# EAGLE board LWOC 2.0 (EAGLE 9.6.2)
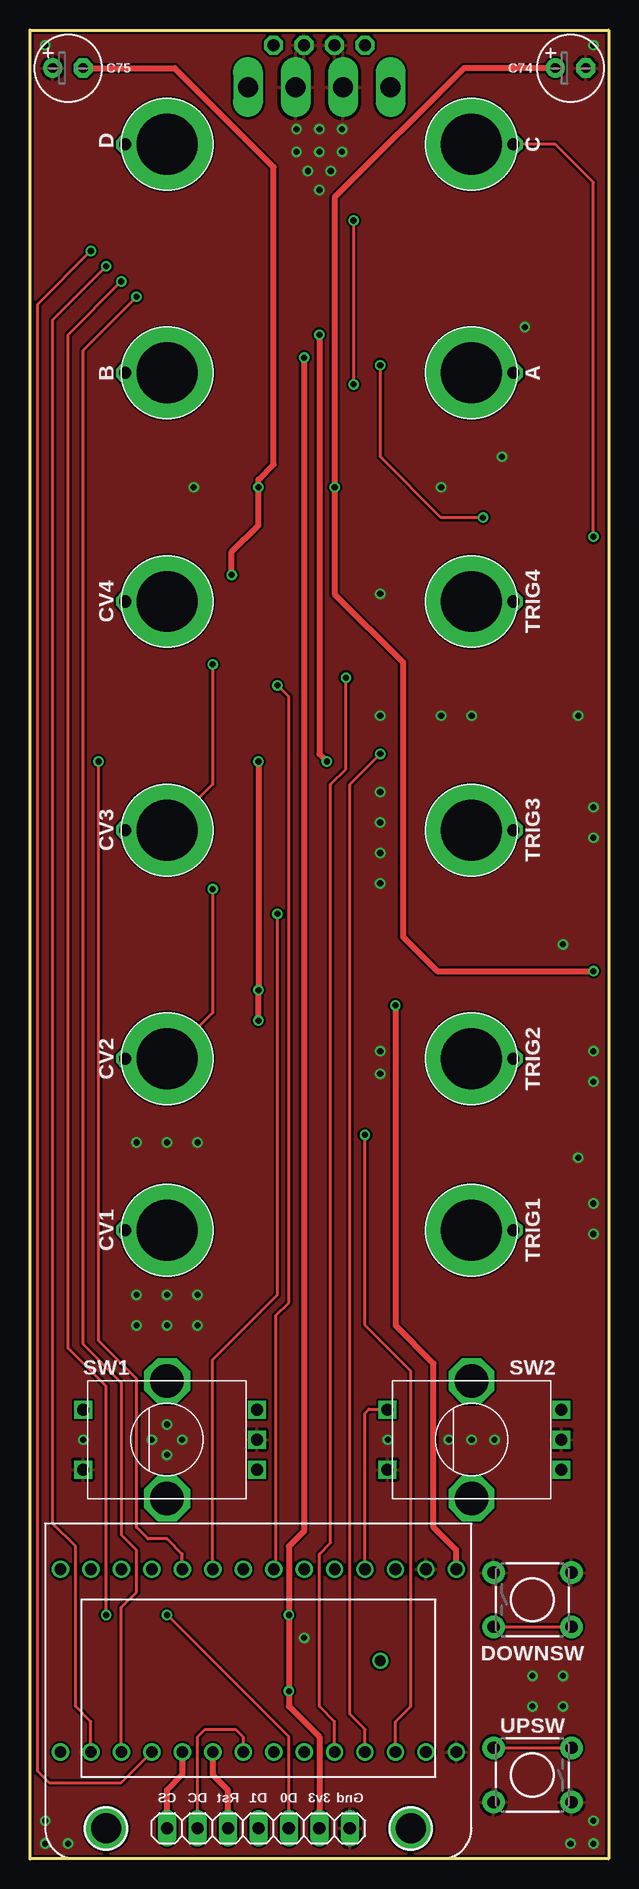
[diagram p0: board, top side]
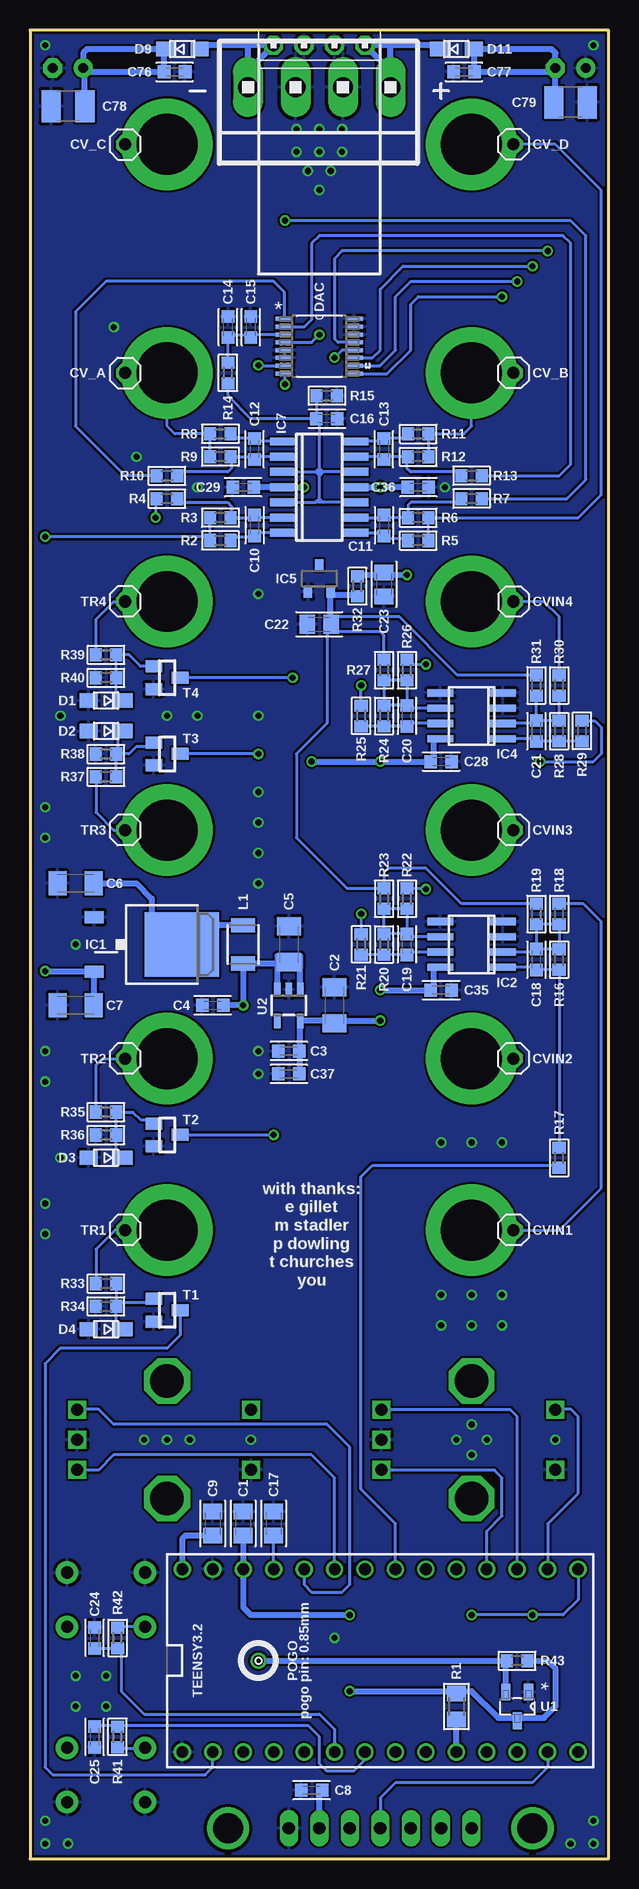
[diagram p1: board, bottom side, seen from below]

Size 48.26 x 152.4 mm. Coordinates in mm from the lower left corner, seen from the top.
Outline: 0,152.4 48.26,152.4 48.26,0 0,0 0,152.4
Copper layers (1*16): Top 0.035mm / dielectric 1.5mm / Bottom 0.035mm
Design rules "SparkFun-2-layer-TIGHT": minimum track width 7mil, minimum drill 15mil, track to track 7mil, track to pad 7mil, pad to pad 7mil, via to via 7mil, smd to smd 7mil, copper to edge 7mil, drill to drill 7mil, minimum pad ring 7mil, minimum via ring 7mil, stop-mask expansion 4mil, vias tented up to drill 25mil, thermal gap 10mil

## Footprints (pad centres in the part's own frame; a part is rotated, then mirrored left to right if it is on the bottom)
BANANA_CONN = drill 5.08 pad 7.62: P$1 0,0
C0805K = smd 1.3 x 1.6: 1 -1,0; 2 1,0
C1206K = smd 1.5 x 2: 1 -1.5,0; 2 1.5,0
RCL_C0603K = smd 1.05 x 1.08: 1 -0.875,0; 2 0.875,0
RCL_E2,5-6 = drill 0.813 pad 1.6: + -1.27,0 | drill 0.813 pad 1.6 octagon: - 1.27,0
RCL_C1210 = smd 1.6 x 2.7: 1 -1.4,0; 2 1.4,0
1X01 = drill 1.016 octagon: 1 0,0
DIODE_SOD323-W = smd 1.5 x 1.2: A 1.45,0; C -1.45,0
SOP65P640X120-16N = smd 1.473 x 0.356: 1 -2.921,2.286; 2 -2.921,1.626; 3 -2.921,0.965; 4 -2.921,0.33; 5 -2.921,-0.33; 6 -2.921,-0.965; 7 -2.921,-1.626; 8 -2.921,-2.286; 9 2.921,-2.286; 10 2.921,-1.626; 11 2.921,-0.965; 12 2.921,-0.33; 13 2.921,0.33; 14 2.921,0.965; 15 2.921,1.626; 16 2.921,2.286
SPARKFUN_TACTILE-PTH = drill 1.016 pad 1.88: 1 -3.251,2.261; 2 3.251,2.261; 3 -3.251,-2.261; 4 3.251,-2.261
TO252 = smd 1 x 1.6: 1 -2.28,-6.07; 2 2.28,-6.07 | smd 5.4 x 6.2: 3 0,1.23
GM-ICS_SO08 = smd 0.6 x 2.2: 1 -1.905,-2.6; 2 -0.635,-2.6; 3 0.635,-2.6; 4 1.905,-2.6; 5 1.905,2.6; 6 0.635,2.6; 7 -0.635,2.6; 8 -1.905,2.6
DBZ_R-PDSO-G3 = smd 0.7 x 1: 1 -0.95,-1.1; 2 0.95,-1.1; 3 0,1.1
GM-ICS_SO14 = smd 0.66 x 2.032: 1 -3.81,-3.073; 2 -2.54,-3.073; 3 -1.27,-3.073; 4 0,-3.073; 5 1.27,-3.073; 6 2.54,-3.073; 7 3.81,-3.073; 8 3.81,3.073; 9 2.54,3.073; 10 1.27,3.073; 11 0,3.073; 12 -1.27,3.073; 13 -2.54,3.073; 14 -3.81,3.073
1X4MTA = drill 1.676 long: 1 5.944,0; 2 1.981,0; 3 -1.981,0; 4 -5.944,0
1X04MTA = drill 1.016 pad 1.575 octagon: 1 3.81,0; 2 1.27,0; 3 -1.27,0; 4 -3.81,0
1X07 = drill 1.016 long: 1 -7.62,0; 2 -5.08,0; 3 -2.54,0; 4 0,0; 5 2.54,0; 6 5.08,0; 7 7.62,0
1210 = smd 1.2 x 2: 1 -1.6,0; 2 1.6,0
M0805 = smd 1.3 x 1.6: 1 -1.077,0; 2 1.077,0
RCL_R0603 = smd 1 x 1.1: 1 -0.85,0; 2 0.85,0
OG-ENCODER_ALPS_EC12E_SW = drill 1 square: A -2.5,-7.5; B 2.5,-7.5; C 0,-7.5; D -2.5,7; E 2.5,7 | drill 2.8 octagon: GND1 -4.9,0; GND2 4.9,0
SOT23-BEC = smd 1 x 1.4: B -0.95,-1.1; C 0,1.1; E 0.95,-1.1
TEENSY_3.0-3.2&LC_DIL = drill 0.965: 0 -7.62,13.97; 1 -7.62,11.43; 2 -7.62,8.89; 3 -7.62,6.35; 3.3V 7.62,11.43; 4 -7.62,3.81; 5 -7.62,1.27; 6 -7.62,-1.27; 7 -7.62,-3.81; 8 -7.62,-6.35; 9 -7.62,-8.89; 10 -7.62,-11.43; 11 -7.62,-13.97; 12 -7.62,-16.51; 13 7.62,-16.51; 14/A0 7.62,-13.97; 15/A1 7.62,-11.43; 16/A2 7.62,-8.89; 17/A3 7.62,-6.35; 18/A4 7.62,-3.81; 19/A5 7.62,-1.27; 20/A6 7.62,1.27; 21/A7 7.62,3.81; 22/A8 7.62,6.35; 23/A9 7.62,8.89; AGND 7.62,13.97; GND -7.62,16.51; VIN 7.62,16.51
SOT95P232X110-3N = smd 1.397 x 0.762: 1 -1.194,0.94; 2 -1.194,-0.94; 3 1.194,0
SOT23-5 = smd 0.55 x 1.2: 1 -0.95,-1.3; 2 0,-1.3; 3 0.95,-1.3; 4 0.95,1.3; 5 -0.95,1.3
MOUNTINGHOLE_2.5_PLATED = drill 2.5 pad 3.2: P$1 0,0

## Placement (x,y rotation side)
A  [BANANA_CONN]  36.83,123.83 180 top
B  [BANANA_CONN]  11.43,123.83 180 top
C  [BANANA_CONN]  36.83,142.88 180 top
C1  470n  [C0805K]  30.48,27.94 90 bottom
C2  10u  [C1206K]  22.86,71.12 90 bottom
C3  100n  [RCL_C0603K]  26.67,67.31 180 bottom
C4  100n  [RCL_C0603K]  33.02,71.12 180 bottom
C5  10u  [C1206K]  26.67,76.2 90 bottom
C6  10u  [C1206K]  44.45,81.28 180 bottom
C7  10u  [C1206K]  44.45,71.12 180 bottom
C8  100n  [RCL_C0603K]  24.77,5.72 180 bottom
C9  470n  [C0805K]  33.02,27.94 90 bottom
C10  22p  [RCL_C0603K]  29.53,111.12 270 bottom
C11  22p  [RCL_C0603K]  18.73,111.12 270 bottom
C12  22p  [RCL_C0603K]  29.53,117.47 90 bottom
C13  22p  [RCL_C0603K]  18.73,117.47 90 bottom
C14  100n  [RCL_C0603K]  31.75,127.64 90 bottom
C15  470n  [RCL_C0603K]  29.84,127.64 90 bottom
C16  100n  [RCL_C0603K]  23.49,120.02 0 bottom
C17  470n  [C0805K]  27.94,27.94 90 bottom
C18  560p  [RCL_C0603K]  6.03,74.93 270 bottom
C19  560p  [RCL_C0603K]  16.83,76.2 270 bottom
C20  560p  [RCL_C0603K]  16.83,95.25 270 bottom
C21  560p  [RCL_C0603K]  6.03,93.98 270 bottom
C22  1uf  [C0805K]  24.13,102.87 180 bottom
C23  1uf  [C0805K]  18.73,106.2 270 bottom
C24  100n  [RCL_C0603K]  42.86,18.42 90 bottom
C25  100n  [RCL_C0603K]  42.86,10.16 90 bottom
C28  100n  [RCL_C0603K]  13.97,91.44 0 bottom
C29  100n  [RCL_C0603K]  30.48,114.3 180 bottom
C35  100n  [RCL_C0603K]  13.97,72.39 0 bottom
C36  100n  [RCL_C0603K]  15.87,114.3 180 bottom
C37  100n  [RCL_C0603K]  26.67,65.41 180 bottom
C74  47uF  [RCL_E2,5-6]  45.08,149.23 0 top
C75  47uF  [RCL_E2,5-6]  3.18,149.23 0 top
C76  100nF  [RCL_C0603K]  36.2,148.91 0 bottom
C77  100nF  [RCL_C0603K]  12.06,148.91 0 bottom
C78  10uF  [RCL_C1210]  45.08,146.05 180 bottom
C79  10uF  [RCL_C1210]  3.18,146.37 180 bottom
CV1  [BANANA_CONN]  11.43,52.39 180 top
CV2  [BANANA_CONN]  11.43,66.67 180 top
CV3  [BANANA_CONN]  11.43,85.73 180 top
CV4  [BANANA_CONN]  11.43,104.78 180 top
CV_A  [1X01]  40.32,123.83 90 bottom
CV_B  [1X01]  7.94,123.83 270 bottom
CV_C  [1X01]  40.32,142.88 90 bottom
CV_D  [1X01]  7.94,142.88 270 bottom
CVIN1  [1X01]  7.94,52.39 270 bottom
CVIN2  [1X01]  7.94,66.67 270 bottom
CVIN3  [1X01]  7.94,85.73 270 bottom
CVIN4  [1X01]  7.94,104.78 0 bottom
D  [BANANA_CONN]  11.43,142.88 180 top
D1  4148  [DIODE_SOD323-W]  41.91,96.52 180 bottom
D2  4148  [DIODE_SOD323-W]  41.91,93.98 180 bottom
D3  4148  [DIODE_SOD323-W]  41.91,58.42 180 bottom
D4  4148  [DIODE_SOD323-W]  41.91,44.13 180 bottom
D9  1N5819  [DIODE_SOD323-W]  35.56,150.81 0 bottom
D11  1N5819  [DIODE_SOD323-W]  12.7,150.81 0 bottom
DAC  DAC8565  [SOP65P640X120-16N]  24.13,126.05 0 bottom
DOWNSW  [SPARKFUN_TACTILE-PTH]  41.91,21.59 0 top
IC1  [TO252]  36.83,76.2 270 bottom
IC2  MCP6002  [GM-ICS_SO08]  11.43,76.2 90 bottom
IC4  MCP6002  [GM-ICS_SO08]  11.43,95.25 90 bottom
IC5  LM4040-5  [DBZ_R-PDSO-G3]  24.13,106.68 0 bottom
IC7  OPA4172  [GM-ICS_SO14]  24.13,114.3 270 bottom
J2  [1X4MTA]  24.13,147.64 180 bottom
J3  MTA04-100  [1X04MTA]  24.13,151.13 180 bottom
JP1  OLED  [1X07]  19.05,2.54 180 top
L1  10uH  [1210]  30.48,76.2 270 bottom
R1  10k  [M0805]  12.7,12.7 90 bottom
R2  220  [RCL_R0603]  32.38,109.86 180 bottom
R3  100k  [RCL_R0603]  32.38,111.76 180 bottom
R4  24k9  [RCL_R0603]  36.83,113.35 0 bottom
R5  220  [RCL_R0603]  15.87,109.86 0 bottom
R6  100k  [RCL_R0603]  15.87,111.76 0 bottom
R7  24k9  [RCL_R0603]  11.43,113.35 180 bottom
R8  220  [RCL_R0603]  32.38,118.75 180 bottom
R9  100k  [RCL_R0603]  32.38,116.84 180 bottom
R10  24k9  [RCL_R0603]  36.83,115.25 0 bottom
R11  220  [RCL_R0603]  15.87,118.75 0 bottom
R12  100k  [RCL_R0603]  15.87,116.84 0 bottom
R13  24k9  [RCL_R0603]  11.43,115.25 180 bottom
R14  47k  [RCL_R0603]  31.75,123.83 90 bottom
R15  47k  [RCL_R0603]  23.49,121.92 180 bottom
R16  33k  [RCL_R0603]  4.13,74.93 270 bottom
R17  100r  [RCL_R0603]  4.13,58.42 270 bottom
R18  100k  [RCL_R0603]  4.13,78.74 270 bottom
R19  75k  [RCL_R0603]  6.03,78.74 270 bottom
R20  33k  [RCL_R0603]  18.73,76.2 270 bottom
R21  100r  [RCL_R0603]  20.64,76.2 90 bottom
R22  100k  [RCL_R0603]  16.83,80.01 270 bottom
R23  75k  [RCL_R0603]  18.73,80.01 270 bottom
R24  33k  [RCL_R0603]  18.73,95.25 270 bottom
R25  100r  [RCL_R0603]  20.64,95.25 90 bottom
R26  100k  [RCL_R0603]  16.83,99.06 270 bottom
R27  75k  [RCL_R0603]  18.73,99.06 270 bottom
R28  33k  [RCL_R0603]  4.13,93.98 270 bottom
R29  100r  [RCL_R0603]  2.22,93.98 90 bottom
R30  100k  [RCL_R0603]  4.13,97.79 270 bottom
R31  75k  [RCL_R0603]  6.03,97.79 270 bottom
R32  2k  [RCL_R0603]  20.95,106.05 90 bottom
R33  100k  [RCL_R0603]  41.91,47.94 0 bottom
R34  33k  [RCL_R0603]  41.91,46.04 0 bottom
R35  100k  [RCL_R0603]  41.91,62.23 0 bottom
R36  33k  [RCL_R0603]  41.91,60.33 0 bottom
R37  100k  [RCL_R0603]  41.91,90.17 0 bottom
R38  33k  [RCL_R0603]  41.91,92.08 0 bottom
R39  100k  [RCL_R0603]  41.91,100.33 0 bottom
R40  33k  [RCL_R0603]  41.91,98.43 0 bottom
R41  510r  [RCL_R0603]  40.96,10.16 90 bottom
R42  510r  [RCL_R0603]  40.96,18.42 270 bottom
R43  100K  [RCL_R0603]  7.62,16.51 0 bottom
SW1  ENCODER  [OG-ENCODER_ALPS_EC12E_SW]  11.43,34.93 90 top
SW2  ENCODER  [OG-ENCODER_ALPS_EC12E_SW]  36.83,34.93 90 top
T1  2N3904  [SOT23-BEC]  36.83,45.72 270 bottom
T2  2N3904  [SOT23-BEC]  36.83,60.33 270 bottom
T3  2N3904  [SOT23-BEC]  36.83,92.08 270 bottom
T4  2N3904  [SOT23-BEC]  36.83,98.43 270 bottom
TEENSY3.2  TEENSY_3.1-3.2_DIL  [TEENSY_3.0-3.2&LC_DIL]  19.05,16.51 90 bottom
TR1  [1X01]  40.32,52.39 270 bottom
TR2  [1X01]  40.32,66.67 270 bottom
TR3  [1X01]  40.32,85.73 270 bottom
TR4  [1X01]  40.32,104.78 270 bottom
TRIG1  [BANANA_CONN]  36.83,52.39 180 top
TRIG2  [BANANA_CONN]  36.83,66.67 180 top
TRIG3  [BANANA_CONN]  36.83,85.73 180 top
TRIG4  [BANANA_CONN]  36.83,104.78 180 top
U1  MIC803-30D4VM3TR  [SOT95P232X110-3N]  7.62,12.7 270 bottom
U2  [SOT23-5]  26.67,71.12 180 bottom
U$23  MOUNTINGHOLE2.5  [MOUNTINGHOLE_2.5_PLATED]  6.35,2.54 180 top
U$26  MOUNTINGHOLE2.5  [MOUNTINGHOLE_2.5_PLATED]  31.75,2.54 180 top
UPSW  [SPARKFUN_TACTILE-PTH]  41.91,6.98 180 top

## Library data of the parts
A B C CV1-CV4 D TRIG1-TRIG4 = SparkFun-Connectors
C1 C2 C5-C7 C9 C17 C22 C23 IC5 R1 = elements_v02
C3 C4 C8 C10-C16 C18-C21 C24 C25 C28 C29 C35-C37 C78 C79 D1-D4 DOWNSW IC2 IC4 IC7 R2-R43 UPSW = clouds_v30
C74-C77 D9 D11 = ripples_v40
CV_A CV_B CV_C CV_D CVIN1-CVIN4 JP1 TR1-TR4 = pinhead
DAC = DAC8565IAPW; AVAILABILITY: Good; DESCRIPTION: 16-Bit, Quad Channel, Ultra-Low Glitch, Voltage Output DAC with 2.5V, 2ppm/C Internal eference 16-TSSOP -40 to 105; MF: Texas Instruments; MP: DAC8565IAPW; PACKAGE: TSSOP-16 Texas Instruments; PRICE: 11.99 USD
IC1 = v-reg-2
J2 = con-amp
J3 = AMP_MTA
L1 = Icotech_Eagle_Library
SW1 SW2 = braids_v50
T1-T4 = transistor
TEENSY3.2 = Teensy_3_and_LC_Series_Boards_v1.4
U1 = Micrel_By_element14_Batch_1; MPN: MIC803-30D4VM3TR; OC_FARNELL: 1924769; OC_NEWARK: 58T4951; PACKAGE: SOT-23-3; SUPPLIER: MICREL SEMICONDUCTOR
U2 U$23 U$26 = microbuilder

## Nets
+3V3A: C2.1 C3.1 C28.1 C35.1 C37.1 DAC.4 IC2.8 IC4.8 U2.5
+3V3D: C1.1 C8.1 DAC.12 JP1.2 R1.2 R43.2 TEENSY3.2.3.3V U1.3
+5V: C4.1 C5.1 C9.1 L1.2 TEENSY3.2.VIN U2.1 U2.3
+12V: C7.1 C29.1 C74.+ C76.1 C78.1 D9.C IC1.2 IC7.4
-12V: C23.1 C36.2 C75.- C77.2 C79.2 D11.A IC7.11 R32.2
CS_DAC: DAC.9 TEENSY3.2.10
CS_OLED: JP1.7 R1.1 TEENSY3.2.8
CV1: R17.2 TEENSY3.2.19/A5
CV2: R21.2 TEENSY3.2.18/A4
CV3: R25.2 TEENSY3.2.20/A6
CV4: R29.2 TEENSY3.2.17/A3
CV_A: DAC.1 R10.1
CV_B: DAC.2 R13.1
CV_C: DAC.7 R4.1
CV_D: DAC.8 R7.1
DC: JP1.6 TEENSY3.2.6
DOUT: DAC.11 JP1.4 TEENSY3.2.11
ENC_L1: SW2.B TEENSY3.2.22/A8
ENC_L2: SW2.A TEENSY3.2.21/A7
ENC_R1: SW1.B TEENSY3.2.15/A1
ENC_R2: SW1.A TEENSY3.2.16/A2
GND: C1.2 C2.2 C3.2 C4.2 C5.2 C6.2 C7.2 C8.2 C9.2 C14.2 C15.2 C16.2 C17.2 C22.2 C23.2 C24.2 C25.1 C28.2 C29.2 C35.2 C36.1 C37.2 C74.- C75.+ C76.2 C77.1 C78.2 C79.1 D1.A D2.A D3.A D4.A DAC.5 DAC.6 DAC.14 DAC.15 DAC.16 DOWNSW.1 DOWNSW.2 IC1.1 IC2.3 IC2.4 IC2.5 IC4.3 IC4.4 IC4.5 IC5.1 J2.2 J2.3 J3.2 J3.3 JP1.1 R15.1 R34.1 R36.1 R38.1 R40.1 SW1.C SW1.D SW2.C SW2.D T1.E T2.E T3.E T4.E TEENSY3.2.AGND TEENSY3.2.GND U1.1 U2.2 UPSW.1 UPSW.2
N$1: C18.2 IC2.1 R16.2 R17.1
N$2: C6.1 IC1.3 L1.1
N$3: C10.1 IC7.6 R3.1 R4.2
N$4: CV1.P$1 CVIN1.1 R18.1
N$5: R39.1 TR4.1 TRIG4.P$1
N$6: C10.2 IC7.7 R2.1
N$7: C11.1 IC7.9 R6.1 R7.2
N$8: A.P$1 CV_A.1 R8.2 R9.2
N$9: C18.1 IC2.2 R16.1 R18.2 R19.2
N$10: C11.2 IC7.8 R5.1
N$11: R33.1 TR1.1 TRIG1.P$1
N$12: C12.1 IC7.2 R9.1 R10.2
N$15: CV2.P$1 CVIN2.1 R22.1
N$16: C12.2 IC7.1 R8.1
N$17: C19.1 IC2.6 R20.1 R22.2 R23.2
N$18: C13.1 IC7.13 R12.1 R13.2
N$19: C.P$1 CV_C.1 R2.2 R3.2
N$20: C19.2 IC2.7 R20.2 R21.1
N$21: C13.2 IC7.14 R11.1
N$22: DOWNSW.3 DOWNSW.4 R42.1
N$23: CV3.P$1 CVIN3.1 R26.1
N$24: C20.1 IC4.6 R24.1 R26.2 R27.2
N$25: C20.2 IC4.7 R24.2 R25.1
N$26: R41.1 UPSW.3 UPSW.4
N$27: CV4.P$1 CVIN4.1 R30.1
N$28: C21.1 IC4.2 R28.1 R30.2 R31.2
N$29: C21.2 IC4.1 R28.2 R29.1
N$30: B.P$1 CV_B.1 R11.2 R12.2
N$31: R35.1 TR2.1 TRIG2.P$1
N$32: CV_D.1 D.P$1 R5.2 R6.2
N$33: D2.C R37.2 R38.2 T3.B
N$34: R37.1 TR3.1 TRIG3.P$1
N$38: D1.C R39.2 R40.2 T4.B
N$40: D3.C R35.2 R36.2 T2.B
N$41: D4.C R33.2 R34.2 T1.B
N$196: D11.C J2.4 J3.4
N$263: D9.A J2.1 J3.1
OFFSET: C22.1 IC5.2 R19.1 R23.1 R27.1 R31.1 R32.1
POGO: R43.1 U1.2
RST: JP1.5 TEENSY3.2.7
RST_DAC: DAC.13 TEENSY3.2.9
SCK: DAC.10 JP1.3 TEENSY3.2.13
SW_B: C24.1 R42.2 TEENSY3.2.4
SW_L: C17.1 SW2.E TEENSY3.2.23/A9
SW_R: SW1.E TEENSY3.2.14/A0
SW_T: C25.2 R41.2 TEENSY3.2.5
TR1: T1.C TEENSY3.2.0
TR2: T2.C TEENSY3.2.1
TR3: T3.C TEENSY3.2.2
TR4: T4.C TEENSY3.2.3
UNUSED: TEENSY3.2.12
V_BIAS: C16.1 IC7.3 IC7.5 IC7.10 IC7.12 R14.1 R15.2
VREF_2V5: C14.1 C15.1 DAC.3 R14.2

## Tracks (layer width: path | path; a pad name or v marks a point on that pad's centre or on a via)
+3V3A  (via drill 0.51)
  Top 0.508: v19.05,91.44 v19.05,72.39 v19.05,69.85 | v24.77,91.44 24.13,92.08 v24.13,127
  Bottom 0.254: DAC.4 27.04,126.37 24.77,126.37 v24.13,127
  Bottom 0.508: IC2.8 14.6,74.3 14.6,72.63 C35.1 v19.05,72.39 | IC4.8 14.6,93.34 14.6,91.68 C28.1 v19.05,91.44 v24.77,91.44 | v19.05,69.85 22.63,69.85 C2.1 23.06,69.82 U2.5 25.72,67.39 | C3.1 25.72,67.39 | C37.1 25.72,65.48 25.72,67.39
+3V3D  (via drill 0.51)
  Top 0.508: v22.86,125.09 22.86,27.3 21.59,26.04 v21.59,20.32 v21.59,13.97 21.59,12.7 24.13,10.16 JP1.2
  Bottom 0.254: DAC.12 22.24,125.72 v22.86,125.09
  Bottom 0.508: C1.1 TEENSY3.2.3.3V 30.48,20.96 29.84,20.32 v21.59,20.32 | R43.2 5.08,16.51 4.45,15.88 4.45,12.7 5.4,11.75 7.38,11.75 U1.3 7.62,11.75 9.21,11.75 11.43,13.97 12.51,13.97 R1.2 12.89,13.97 v21.59,13.97 | JP1.2 24.13,5.48 C8.1
+5V  (via drill 0.51)
  Top 0.508: v30.48,71.12 30.48,44.45 33.66,41.28 33.66,27.62 35.56,25.72 TEENSY3.2.VIN
  Bottom 0.508: 25.72,74.61 26.58,74.61 C5.1 27.21,74.7 27.62,74.3 | 27.62,74.6 L1.2 v30.48,71.12 C4.1 | C9.1 35.29,26.94 35.56,26.67 TEENSY3.2.VIN | U2.3 27.62,73.98 | 27.62,73.98 27.62,74.3 | 27.62,74.3 27.62,74.6 | U2.1 25.72,74.3 | 25.72,74.3 25.72,74.61 | 27.62,74.6 25.73,74.6 25.72,74.61 | 25.72,74.3 25.72,75.25 27.62,75.25 27.62,73.98
+12V  (via drill 0.51)
  Top 0.508: v46.99,73.98 33.97,73.98 31.11,76.84 31.11,99.7 25.41,105.4 v25.41,114.3 25.41,138.44 36.2,149.23 C74.+
  Bottom 0.508: C29.1 IC7.4 v25.41,114.3 | C7.1 42.9,71.17 IC1.2 46.93,73.92 v46.99,73.98 | C74.+ 43.5,148.91 C76.1 37.07,150.75 D9.C 43.5,150.81 43.81,150.5 C74.+ | C78.1 43.69,149.09 C74.+
-12V  (via drill 0.51)
  Top 0.508: C75.- 12.06,149.23 20.32,140.97 20.32,116.21 19.05,114.94 v19.05,114.3 19.05,111.12 16.83,108.9 v16.83,107
  Bottom 0.508: C36.2 v19.05,114.3 IC7.11 | R32.2 20.85,107 18.94,107 C23.1 18.53,107 v16.83,107 | C75.- 4.76,148.91 C77.2 11.19,150.75 D11.A 4.76,150.81 4.45,150.5 C75.- | C79.2 4.45,146.5 C75.-
CS_DAC  (via drill 0.51)
  Top 0.254: TEENSY3.2.10 7.62,20.96 8.89,22.23 8.89,25.72 7.62,26.99 7.62,39.69 4.45,42.86 4.45,125.73 v8.89,130.18
  Bottom 0.254: v8.89,130.18 15.87,130.18 16.51,129.54 16.51,125.73 18.48,123.76 DAC.9
CS_OLED
  Top 0.508: JP1.7 11.43,5.72 12.7,6.98 TEENSY3.2.8
  Bottom 0.508: TEENSY3.2.8 R1.1
CV1
  Bottom 0.254: TEENSY3.2.19/A5 17.78,27.94 20.64,30.8 20.64,56.83 19.68,57.79 4.34,57.79 R17.2
CV2  (via drill 0.51)
  Top 0.254: v20.64,78.74 20.64,46.99 15.24,41.59 TEENSY3.2.18/A4
  Bottom 0.254: v20.64,78.74 R21.2
CV3  (via drill 0.51)
  Top 0.254: v20.64,97.79 21.59,96.84 21.59,46.36 20.48,45.24 20.48,24.45 20.32,24.29 TEENSY3.2.20/A6
  Bottom 0.254: R25.2 v20.64,97.79
CV4  (via drill 0.51)
  Top 0.254: TEENSY3.2.17/A3 12.7,25.4 11.43,26.67 9.84,26.67 8.89,27.62 8.89,40.01 5.71,43.18 v5.71,91.44
  Bottom 0.254: v5.71,91.44 1.27,91.44 0.63,92.08 0.63,94.3 1.17,94.83 R29.2
CV_A
  Bottom 0.254: R10.1 40.32,115.25 44.45,119.38 44.45,128.91 41.91,131.44 27.94,131.44 27.05,130.56 DAC.1
CV_B
  Bottom 0.254: R13.1 4.13,115.25 3.18,116.21 3.18,134.62 3.81,135.25 24.13,135.25 24.77,134.62 24.77,128.27 25.36,127.67 DAC.2
CV_C  (via drill 0.51)
  Top 0.254: v37.78,111.76 34.29,111.76 29.21,116.84 v29.21,124.46
  Bottom 0.254: v29.21,124.46 29.17,124.42 DAC.7 | R4.1 37.78,113.25 v37.78,111.76
CV_D  (via drill 0.51)
  Top 0.254: v26.99,136.53 v26.99,122.87
  Bottom 0.254: R7.1 3.49,113.35 1.9,114.94 1.9,135.25 3.18,136.53 v26.99,136.53 | v26.99,122.87 26.99,123.7 DAC.8
DC
  Top 0.254: JP1.6 13.97,10.16 14.6,10.8 17.14,10.8 17.78,10.16 TEENSY3.2.6
DOUT  (via drill 0.51)
  Top 0.254: TEENSY3.2.11 5.08,11.43 3.81,12.7 3.81,26.04 1.9,27.94 1.9,128.27 v6.35,132.72
  Bottom 0.254: TEENSY3.2.11 5.08,7.62 6.35,6.35 17.78,6.35 19.05,5.08 JP1.4 | DAC.11 19.7,125.08 19.05,125.73 19.05,130.81 17.14,132.72 v6.35,132.72
ENC_L1
  Bottom 0.254: TEENSY3.2.22/A8 25.4,22.86 24.77,22.23 22.22,22.23 21.59,22.86 21.59,34.29 23.49,36.2 41.27,36.2 42.55,37.47 44.29,37.47 SW2.B
ENC_L2
  Bottom 0.254: TEENSY3.2.21/A7 22.86,31.75 24.77,33.66 41.27,33.66 42.55,32.39 44.29,32.39 SW2.A
ENC_R1
  Bottom 0.254: TEENSY3.2.15/A1 7.62,36.83 8.21,37.43 SW1.B
ENC_R2
  Bottom 0.254: SW1.A 18.93,32.39 9.52,32.39 8.89,31.75 8.89,28.58 10.16,27.3 TEENSY3.2.16/A2
GND  (via drill 0.51)
  other vias: 34.29,114.3 13.65,114.3 29.21,67.31 29.21,65.41 44.45,76.2 45.72,95.25 45.72,58.42 44.45,15.24 41.91,15.24 41.91,12.7 44.45,12.7 29.21,83.82 29.21,81.28 29.21,86.36 29.21,88.9 36.83,95.25 34.29,95.25 29.21,95.25 29.21,105.41 46.99,87.63 46.99,85.09 46.99,67.31 46.99,64.77 46.99,52.07 46.99,54.61 11.43,46.99 11.43,44.45 8.89,44.45 8.89,46.99 8.89,59.69 11.43,59.69 13.97,59.69 39.37,116.84 13.97,46.99 13.97,44.45 10.16,34.93 11.43,36.2 11.43,33.66 12.7,34.93 36.83,34.93 38.73,34.93 34.92,34.93 1.27,1.27 1.27,3.17 3.18,1.27 46.99,1.27 45.08,1.27 46.99,3.17 1.27,151.13 46.99,151.13 24.13,144.14 22.22,144.14 26.04,144.14 24.13,142.24 26.04,142.24 22.22,142.24 23.18,140.65 25.08,140.65 24.13,139.06 22.86,18.42 4.45,34.93 29.84,34.93 41.27,127.64
  pour Bottom: 48.26,152.4 0,152.4 0,0 48.26,0
  pour Top: 48.26,0 0,0 0,152.4 48.26,152.4
N$1
  Bottom 0.254: IC2.1 6.27,74.3 C18.2 6.01,74.08 R16.2 R17.1
N$2
  Bottom 0.508: L1.1 35.23,77.8 36.83,76.2 | 36.83,76.2 IC1.3 | C6.1 39.37,81.28 38.1,80.01 38.1,77.47 36.83,76.2
N$3
  Bottom 0.254: IC7.6 29.29,111.76 | 29.29,111.76 C10.1 | 31.43,111.76 R3.1 31.43,111.86 | 31.43,111.76 29.29,111.76 | R4.2 35.66,113.03 31.75,113.03 31.43,112.71 31.43,112.4 31.43,111.86 | 31.43,111.86 31.43,111.76
N$4
  Bottom 0.254: CVIN1.1 CV1.P$1 4.13,52.39 0.63,55.88 0.63,78.11 2.12,79.59 R18.1
N$5
  Bottom 0.254: R39.1 42.76,103.29 41.27,104.78 TR4.1 TRIG4.P$1
N$6
  Bottom 0.254: IC7.7 29.29,110.49 C10.2 29.6,110.17 31.22,110.17 R2.1
N$7
  Bottom 0.254: IC7.9 18.97,111.76 | C11.1 18.97,111.76 | 18.97,111.76 R6.1 16.72,112.81 16.51,113.03 12.6,113.03 R7.2
N$8
  Top 0.254: A.P$1 CV_A.1
  Bottom 0.254: R9.2 R8.2 36.2,118.75 36.83,119.38 A.P$1
N$9
  Bottom 0.254: C18.1 6.27,75.56 IC2.2 | R16.1 4.15,75.81 | 4.15,75.81 C18.1 | 4.15,75.81 4.13,75.83 R18.2 R19.2 C18.1
N$10
  Bottom 0.254: IC7.8 18.97,110.49 C11.2 18.5,110.01 16.88,110.01 R5.1
N$11
  Bottom 0.254: TR1.1 TRIG1.P$1 41.17,52.39 42.76,50.8 R33.1
N$12
  Bottom 0.254: IC7.2 28.57,116.84 29.29,116.84 | 29.29,116.84 C12.1 | R10.2 35.66,115.57 31.75,115.57 31.43,115.89 31.43,116.74 R9.1 29.29,116.84
N$15  (via drill 0.51)
  Top 0.254: v15.24,80.8 15.24,70.48 CV2.P$1
  Bottom 0.254: CV2.P$1 CVIN2.1 | R22.1 15.3,80.86 v15.24,80.8
N$16
  Bottom 0.254: IC7.1 29.29,118.11 C12.2 29.6,118.43 31.22,118.43 R8.1
N$17
  Bottom 0.254: IC2.6 16.59,76.84 C19.1 | C19.1 18.71,77.08 R20.1 R23.2 R22.2 C19.1
N$18
  Bottom 0.254: C13.1 18.97,116.84 | 18.97,116.84 IC7.13 | 18.97,116.84 R12.1 16.83,116.74 16.83,115.89 16.51,115.57 12.6,115.57 R13.2
N$19  (via drill 0.51)
  Top 0.254: C.P$1 CV_C.1 43.81,142.88 46.99,139.7 v46.99,110.17
  Bottom 0.254: R3.2 R2.2 33.55,110.17 v46.99,110.17
N$20
  Bottom 0.254: IC2.7 16.59,75.56 C19.2 16.85,75.35 R20.2 R21.1
N$21
  Bottom 0.254: IC7.14 18.97,118.11 C13.2 18.66,118.43 17.04,118.43 R11.1
N$22
  Top 0.254: DOWNSW.3 DOWNSW.4
  Bottom 0.254: DOWNSW.3 38.7,19.37 40.86,19.37 R42.1
N$23  (via drill 0.51)
  Top 0.254: v15.24,99.54 15.24,89.53 CV3.P$1
  Bottom 0.254: CVIN3.1 CV3.P$1 | R26.1 16.45,99.54 v15.24,99.54
N$24
  Bottom 0.254: IC4.6 16.59,95.89 C20.1 | C20.1 18.71,96.12 R24.1 R27.2 R26.2 C20.1
N$25
  Bottom 0.254: IC4.7 16.59,94.62 C20.2 18.71,94.38 R24.2 R25.1
N$26
  Top 0.254: UPSW.4 UPSW.3
  Bottom 0.254: UPSW.4 38.7,9.21 40.86,9.21 R41.1
N$27
  Bottom 0.254: CV4.P$1 8.89,104.78 CVIN4.1 5.4,104.78 4.13,103.5 R30.1
N$28
  Bottom 0.254: C21.1 6.27,94.62 IC4.2 | C21.1 6.01,94.83 R28.1 R30.2 | C21.1 R31.2
N$29
  Bottom 0.254: IC4.1 6.27,93.34 C21.2 6.01,93.13 R28.2 R29.1
N$30
  Top 0.254: CV_B.1 B.P$1
  Bottom 0.254: CV_B.1 B.P$1 11.43,119.38 12.06,118.75 R11.2 R12.2
N$31
  Bottom 0.254: R35.1 42.76,66.14 42.23,66.67 TR2.1 TRIG2.P$1
N$32
  Top 0.254: D.P$1 CV_D.1
  Bottom 0.254: CV_D.1 4.45,142.88 0.63,139.06 0.63,113.67 2.54,111.76 R6.2 R5.2
N$33
  Bottom 0.254: R38.2 40.96,92.18 40.96,93.82 40.8,93.98 D2.C | R37.2 R38.2 | T3.B 38.25,92.71 39.37,92.71 40,92.08 R38.2
N$34
  Bottom 0.254: R37.1 42.76,87.21 41.27,85.73 TR3.1 TRIG3.P$1
N$38
  Bottom 0.254: D1.C 41.06,97.12 R40.2 R39.2 40,100.33 39.05,99.38 T4.B
N$40
  Bottom 0.254: T2.B 38.25,61.59 39.04,61.59 39.68,62.23 R35.2 R36.2 41.06,59.02 D3.C
N$41
  Bottom 0.254: T1.B 38.24,46.36 40.74,46.36 R34.2 | D4.C 41.06,44.73 R34.2 | R33.2 R34.2
N$196
  Bottom 0.508: D11.C 14.47,151.13 18.1,151.13 | 18.1,151.13 J3.4 18.19,149 J2.4 18.19,151.04 18.1,151.13
N$263
  Bottom 0.508: 30.16,151.13 J3.1 30.07,149 J2.1 30.07,151.04 30.16,151.13 | 30.16,151.13 33.79,151.13 D9.A
OFFSET
  Bottom 0.254: R19.1 12.28,79.59 15.24,82.55 18.41,82.55 18.73,82.23 R23.1 21.8,80.86 26.04,85.09 26.04,92.08 23.49,94.62 23.49,102.5 C22.1 22.86,102.87 | R31.1 12.6,98.64 17.46,103.5 22.86,103.5 22.86,102.87 | 22.86,102.87 22.86,102.23 19.05,102.23 18.73,101.92 R27.1
  Bottom 0.508: R32.1 21.11,105.35 22.95,105.35 IC5.2 23.18,102.92 C22.1
POGO  (via drill 0.89)
  Bottom 0.508: U1.2 8.56,16.42 | 8.56,16.42 R43.1 | 8.56,16.42 8.65,16.51 v29.21,16.51
RST
  Top 0.508: JP1.5 16.51,5.72 15.24,6.98 TEENSY3.2.7
RST_DAC  (via drill 0.51)
  Top 0.254: TEENSY3.2.9 7.62,6.35 1.59,6.35 0.63,7.3 0.63,129.54 v5.08,133.99
  Bottom 0.254: DAC.13 22.55,126.38 22.86,126.68 22.86,133.35 22.22,133.99 v5.08,133.99
SCK  (via drill 0.51)
  Top 0.254: v6.35,20.32 6.35,39.37 3.18,42.55 3.18,127 v7.62,131.44 | JP1.3 21.59,10.16 v11.43,20.32
  Bottom 0.254: TEENSY3.2.13 2.54,21.59 3.81,20.32 v6.35,20.32 v11.43,20.32 | DAC.10 19.09,124.42 17.78,125.73 17.78,130.18 16.51,131.44 v7.62,131.44
SW_B
  Bottom 0.254: C24.1 42.84,17.57 R42.2 40.64,17.25 40.64,13.97 38.73,12.06 24.13,12.06 22.86,10.8 TEENSY3.2.4
SW_L
  Top 0.254: TEENSY3.2.23/A9 27.94,37.15 28.26,37.47 29.79,37.47 SW2.E
  Bottom 0.254: TEENSY3.2.23/A9 C17.1
SW_R
  Bottom 0.254: SW1.E 4.45,37.43 4.4,37.47 3.18,37.47 2.54,36.83 2.54,30.48 5.08,27.94 TEENSY3.2.14/A0
SW_T
  Bottom 0.254: C25.2 42.78,11.11 41.06,11.11 R41.2 40.86,11.11 25.08,11.11 24.13,10.16 24.13,7.94 23.49,7.3 21.27,7.3 20.32,8.26 TEENSY3.2.5
TR1
  Bottom 0.254: T1.C 35.73,43.65 36.83,42.55 45.72,42.55 46.99,41.28 46.99,7.62 46.36,6.98 33.66,6.98 33.02,7.62 TEENSY3.2.0
TR2  (via drill 0.51)
  Top 0.254: v27.94,60.33 27.94,44.45 31.75,40.64 31.75,12.7 30.48,11.43 TEENSY3.2.1
  Bottom 0.254: T2.C v27.94,60.33
TR3  (via drill 0.51)
  Top 0.254: v29.21,92.08 26.67,89.53 26.67,12.06 27.94,10.8 TEENSY3.2.2
  Bottom 0.254: v29.21,92.08 T3.C
TR4  (via drill 0.51)
  Top 0.254: v26.35,98.43 26.35,90.81 25.08,89.53 25.08,26.35 24.13,25.4 24.13,12.7 25.4,11.43 TEENSY3.2.3
  Bottom 0.254: v26.35,98.43 T4.C
V_BIAS
  Bottom 0.254: 23.81,115.57 24.13,115.57 | IC7.5 24.45,113.03 | IC7.10 23.81,113.03 | 23.81,113.03 24.13,113.35 | IC7.12 23.81,115.57 | 23.81,115.57 24.13,115.89 | 24.13,115.57 24.13,115.89 | IC7.3 24.45,115.57 | 24.45,115.57 24.13,115.57 | 24.13,115.57 24.13,115.25 | 24.13,115.25 24.45,115.57 | 24.13,113.35 24.13,115.25 | 24.13,115.25 23.81,115.57 | 24.45,115.57 24.29,115.73 24.13,115.89 | 23.81,113.03 24.45,113.03 | 24.45,113.03 24.13,113.35 | R15.2 24.34,120.04 | 24.34,120.04 C16.1 29.84,120.02 31.75,121.92 R14.1 | 24.34,120.04 24.13,119.83 24.13,115.89
VREF_2V5
  Bottom 0.254: DAC.3 29.59,127.01 | 29.59,127.01 C15.1 | 29.59,127.01 31.5,127.01 C14.1 R14.2

## Text on the board
tNames: CS | DC | Rst | D1 | D0 | 3v3 | Gnd
bNames: with thanks: / e gillet / m stadler / p dowling / t churches / you | pogo pin: 0.85mm | POGO
guidelines: D | C | B | A | out | 4 | 3 | 2 | 1 | trig | in | OC | LW